# Altium PCB MainBoard.PcbDoc
Units mm, origin at the board's own origin, x right, y up, seen from the top; angles counter-clockwise.
Board outline 150 x 100 mm, 2 copper layers (Top Layer, Bottom Layer); 65 components, 98 nets, 335 pads, 2 vias.
Unrouted connection lines stored in the file: 23.
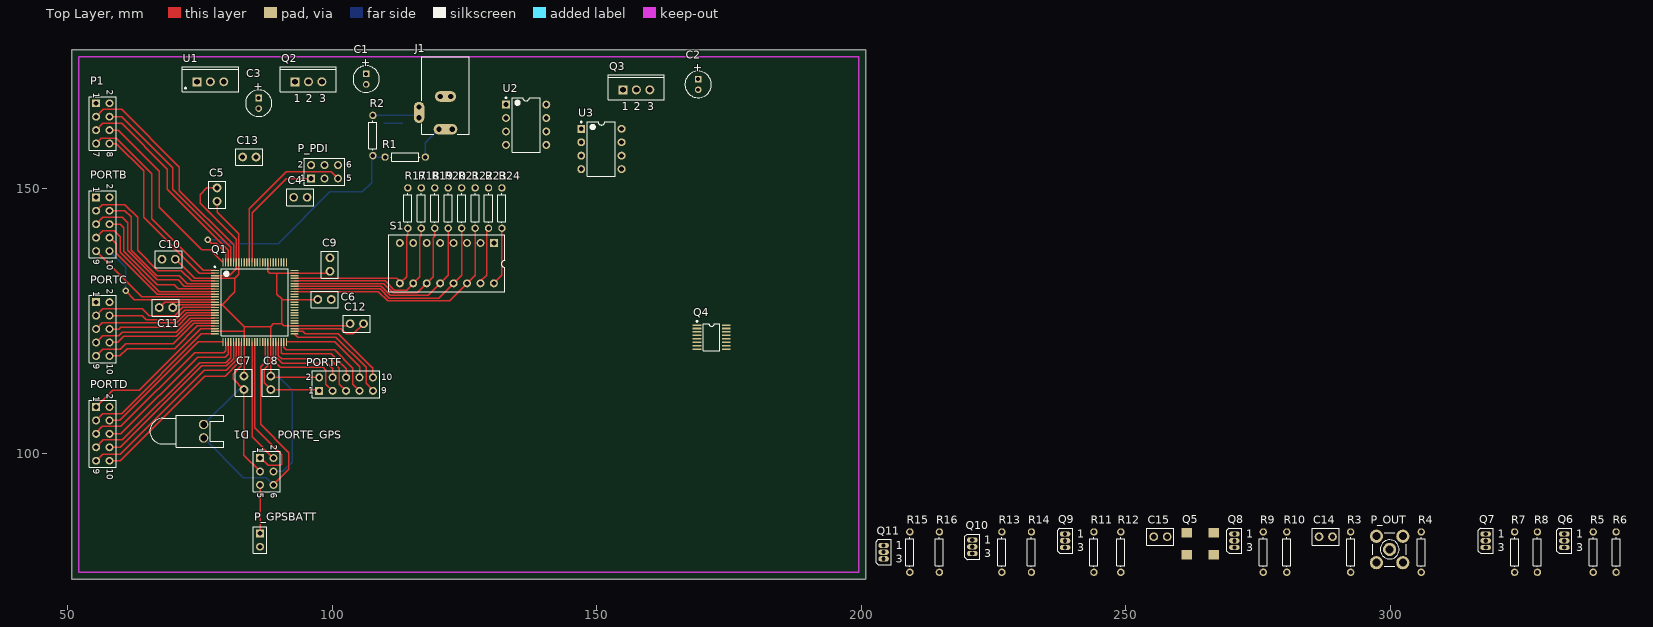
[diagram p0: Top Layer view]
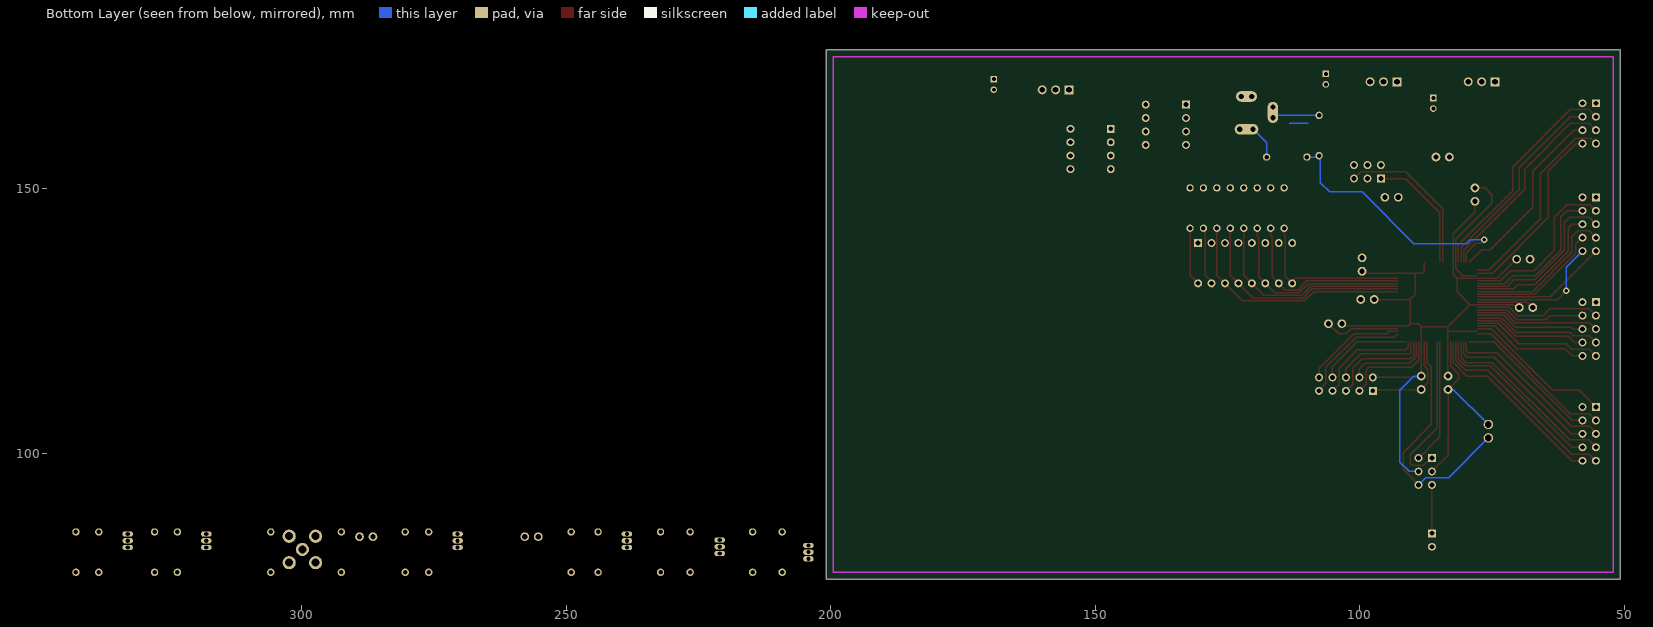
[diagram p1: Bottom Layer view, seen from below]

## Layer stack, top to bottom
Top Layer: signal copper 0.0356
Dielectric: dielectric 0.32, FR-4, Dk 4.8
Bottom Layer: signal copper 0.0356

## Board outline
50.8,76.2 200.8,76.2 200.8,176.2 50.8,176.2

## Design rules (kind name [scope] priority, off if disabled: settings)
Clearance [All] p1: gap=0.05
MinimumSolderMaskSliver [All] p1: minsoldermaskwidth=0.1
PolygonConnect [All] p1: connectstyle=Relief reliefconductorwidth=0.254 reliefentries=4 polygonreliefangle="90 Angle"
RoomDefinition MainBoard_AD9835 [InComponentClass('MainBoard_AD9835')] p1: confinementstyle=ConfineIn formatcopy=TRUE lockcomponents=FALSE outline 202.057,76.454 345.059,76.454 345.059,88.646 202.057,88.646
RoomDefinition MainBoard_XMega [InComponentClass('MainBoard_XMega')] p2: confinementstyle=ConfineIn formatcopy=TRUE lockcomponents=FALSE outline 50.419,27.813 119.507,27.813 119.507,176.657 50.419,176.657
RoomDefinition MainBoard_PSU [InComponentClass('MainBoard_PSU')] p3: confinementstyle=ConfineIn formatcopy=TRUE lockcomponents=FALSE outline 51.054,146.431 173.863,146.431 173.863,177.292 51.054,177.292
RoutingVias [All] p1: holewidth=0.8 width=1.6 viastyle="Through Hole" minholewidth=0.711 minwidth=1.27 maxholewidth=0.711 maxwidth=1.27
SMDNeckDown [All] p1: percent=100.000
SilkscreenOverComponentPads [All] p1: minsilkscreentomaskgap=0.254
SolderMaskExpansion [All] p1: expansion=0.102
TestPointUsage FabricationTestPointUsage [All] p1: valid=0 allowmultiple=FALSE
Testpoint FabricationTestpoint [All] p1: side=3 testpointundercomponent=TRUE minsize=1.016 maxsize=2.54 preferedsize=1.524 minholesize=0 maxholesize=1.016 preferedholesize=0.813 testpointgrid=0.025 style=297 order=0123456789
Width [All] p1: maxlimit=0.3 minlimit=0.1 preferedwidth=0.3
22 further rules are at their usual default settings.

## Classes and differential pairs
component class MainBoard_AD9835: C14 C15 P_OUT Q4 Q5 Q6 Q7 Q8 Q9 Q10 Q11 R3 R4 R5 R6 R7 R8 R9 R10 R11 R12 R13 R14 R15 R16
component class MainBoard_PSU: C1 C2 C3 J1 Q2 Q3 R1 R2 U1 U2 U3
component class MainBoard_XMega: C4 C5 C6 C7 C8 C9 C10 C11 C12 C13 D1 P1 P_GPSBATT P_PDI PORTB PORTC PORTD PORTE_GPS PORTF Q1 R17 R18 R19 R20 R21 R22 R23 R24 S1

## Components (designator, comment, footprint, x,y, rotation, side; value= is the part's Value field where it differs from the comment)
C1 "Cap Pol1" CAPPR2-5x6.8 106.426,170.688 r270 top
C2 "Cap Pol1" CAPPR2-5x6.8 169.164,169.672 r270 top
C3 "Cap Pol1" CAPPR2-5x6.8 86.106,166.116 r270 top
C4 "Cap" CAPR2.54-5.1x3.2 93.98,148.336 r0 top
C5 "Cap" CAPR2.54-5.1x3.2 78.232,148.844 r270 top
C6 "Cap" CAPR2.54-5.1x3.2 98.552,129.032 r180 top
C7 "Cap" CAPR2.54-5.1x3.2 83.312,113.284 r90 top
C8 "Cap" CAPR2.54-5.1x3.2 88.392,113.284 r90 top
C9 "Cap" CAPR2.54-5.1x3.2 99.568,135.636 r270 top
C10 "Cap" CAPR2.54-5.1x3.2 69.088,136.652 r0 top
C11 "Cap" CAPR2.54-5.1x3.2 68.58,127.508 r0 top
C12 "Cap" CAPR2.54-5.1x3.2 104.648,124.46 r180 top
C13 "Cap" CAPR2.54-5.1x3.2 84.328,155.956 r0 top
C14 "Cap" CAPR2.54-5.1x3.2 287.782,84.201 r0 top
C15 "Cap" CAPR2.54-5.1x3.2 256.54,84.201 r0 top
D1 "LED0" LED-0 75.692,104.14 r270 top
J1 "PWR2.5" KLD-0202 121.412,174.9 r270 top
P1 "Header 4X2" HDR2X4 55.372,166.116 r270 top
P_GPSBATT "Header 2" HDR1X2 86.36,84.836 r270 top
P_OUT "SMB" SMB_V-RJ45 299.847,81.788 r0 top
P_PDI "Header 3X2" HDR2X3 96.012,151.892 r0 top
PORTB "Header 5X2" HDR2X5 55.372,148.336 r270 top
PORTC "Header 5X2" HDR2X5 55.372,128.524 r270 top
PORTD "Header 5X2" HDR2X5 55.372,108.712 r270 top
PORTE_GPS "Header 3X2" HDR2X3 86.36,99.06 r270 top
PORTF "Header 5X2" HDR2X5 97.536,111.76 r0 top
Q1 "AT-XMega128A1_TQFP100" TQFP100_L 85.344,128.524 r0 top
Q2 "DE-SW050" TO-220 95.504,170.18 r0 top
Q3 "AnyVolt-Micro" TO-220 157.48,168.656 r0 top
Q4 "AD9835" TSSOP16 171.704,121.92 r270 top
Q5 "CSX750FCC50.000M-UT" CSX750 261.493,84.963 r0 top
Q6 "MOSFET-N" BCY-W3/B.8 332.867,83.439 r0 top
Q7 "MOSFET-N" BCY-W3/B.8 318.008,83.439 r0 top
Q8 "MOSFET-N" BCY-W3/B.8 270.51,83.439 r0 top
Q9 "MOSFET-N" BCY-W3/B.8 238.506,83.439 r0 top
Q10 "MOSFET-N" BCY-W3/B.8 220.98,82.296 r0 top
Q11 "MOSFET-N" BCY-W3/B.8 204.216,81.28 r0 top
R1 "Res1" AXIAL-0.3 113.792,155.956 r180 top
R2 "Res1" AXIAL-0.3 107.696,160.02 r270 top
R3 "Res1" AXIAL-0.3 292.481,81.28 r90 top
R4 "Res1" AXIAL-0.3 305.816,81.28 r90 top
R5 "Res1" AXIAL-0.3 338.328,81.28 r90 top
R6 "Res1" AXIAL-0.3 342.646,81.28 r90 top
R7 "Res1" AXIAL-0.3 323.469,81.28 r90 top
R8 "Res1" AXIAL-0.3 327.787,81.28 r90 top
R9 "Res1" AXIAL-0.3 275.971,81.28 r90 top
R10 "Res1" AXIAL-0.3 280.416,81.28 r90 top
R11 "Res1" AXIAL-0.3 243.967,81.28 r90 top
R12 "Res1" AXIAL-0.3 249.047,81.28 r90 top
R13 "Res1" AXIAL-0.3 226.568,81.28 r90 top
R14 "Res1" AXIAL-0.3 232.156,81.28 r90 top
R15 "Res1" AXIAL-0.3 209.169,81.28 r90 top
R16 "Res1" AXIAL-0.3 214.757,81.28 r90 top
R17 "Res1" AXIAL-0.3 114.3,146.304 r270 top
R18 "Res1" AXIAL-0.3 116.84,146.304 r270 top
R19 "Res1" AXIAL-0.3 119.38,146.304 r270 top
R20 "Res1" AXIAL-0.3 121.92,146.304 r270 top
R21 "Res1" AXIAL-0.3 124.46,146.304 r270 top
R22 "Res1" AXIAL-0.3 127,146.304 r270 top
R23 "Res1" AXIAL-0.3 129.54,146.304 r270 top
R24 "Res1" AXIAL-0.3 132.08,146.304 r270 top
S1 "SW-DIP8" DIP-16-KEY 130.556,139.7 r180 top
U1 "MCP1825S-3302E/AB" TO-220-AB3 76.962,170.18 r0 top
U2 "TC4427AEPA" PDIP300-PA8 136.652,162.052 r0 top
U3 "TC4427AEPA" PDIP300-PA8 150.876,157.48 r0 top

## Footprints (in the part's own frame and the unit in brackets; to place one, negate y for a bottom-side part, rotate by r counter-clockwise, add the part's x,y. Pads: shape width x height; smd on the part's side, far side on the other; paste and mask are expansions set on the pad)
AXIAL-0.3 [mm] "Axial Device, Thru-Hole; 2 Leads; 0.3 in Pin Spacing"
  round 1.4 hole 0.85: 1(-3.81,0) 2(3.81,0)
  silkscreen extent -2.77,-0.76 2.77,0.76
BCY-W3/B.8 [mm] "TO, Flat Index; 3 In-Line, Axial Leads; Body Dia. 4.6mm; Lead Dia. 0.5 mm (max)"
  oval 2x1 hole 0.8: 1(0,1.27) 2(0,0) 3(0,-1.27)
  silkscreen extent -1.41,-2.41 1.41,2.41
CAPPR2-5x6.8 [mm] "Capacitor, Electrolytic, Radial; Body 5 x 6.8 mm (Dia.xH typ); Pin Spacing 2 mm (typ)"
  rect 1.25x1.25 hole 0.75: 1(-1,0)
  round 1.25 hole 0.75: 2(1,0)
  silkscreen extent -2.5,-2.5 2.5,2.5
CAPR2.54-5.1x3.2 [mm] "Capacitor, Ceramic, Thru-Hole, Dipped Radial; Body 5.1 x 3.2 mm (WxT) Pin Spacing 2.54 mm (typ)"
  round 1.65 hole 1: 1(-1.27,0) 2(1.27,0)
  silkscreen extent -2.55,-1.6 2.55,1.6
CSX750 [mm]
  rect 2x1.8 smd: 1(0,-4.2) 2(5.08,-4.2) 3(5.08,0) 4(0,0)
DIP-16-KEY [mm] "DIP; 16 Leads; Row Spacing 7.62 mm; Pitch 2.54 mm"
  rect 1.5x1.5 hole 0.9: 1(0,0)
  round 1.5 hole 0.9: 2(2.54,0) 3(5.08,0) 4(7.62,0) 5(10.16,0) 6(12.7,0) 7(15.24,0) 8(17.78,0) 9(17.78,7.62) 10(15.24,7.62) 11(12.7,7.62) 12(10.16,7.62) 13(7.62,7.62) 14(5.08,7.62) 15(2.54,7.62) 16(0,7.62)
  silkscreen extent -2.05,-1.59 19.83,9.2
HDR1X2 [mm] "Connector; Header; 2 Position"
  rect 1.5x1.5 hole 0.9: 1(0,0)
  round 1.5 hole 0.9: 2(2.54,0)
  silkscreen extent -1.27,-1.27 3.81,1.27
HDR2X3 [mm] "Connector; Header; 3x2 Position"
  rect 1.5x1.5 hole 0.9: 1(0,0)
  round 1.5 hole 0.9: 2(0,2.54) 3(2.54,0) 4(2.54,2.54) 5(5.08,0) 6(5.08,2.54)
  silkscreen extent -1.27,-1.27 6.35,3.81
HDR2X4 [mm] "Connector; Header; 4x2 Position"
  rect 1.5x1.5 hole 0.9: 1(0,0)
  round 1.5 hole 0.9: 2(0,2.54) 3(2.54,0) 4(2.54,2.54) 5(5.08,0) 6(5.08,2.54) 7(7.62,0) 8(7.62,2.54)
  silkscreen extent -1.27,-1.27 8.89,3.81
HDR2X5 [mm] "Connector; Header; 5x2 Position"
  rect 1.5x1.5 hole 0.9: 1(0,0)
  round 1.5 hole 0.9: 2(0,2.54) 3(2.54,0) 4(2.54,2.54) 5(5.08,0) 6(5.08,2.54) 7(7.62,0) 8(7.62,2.54) 9(10.16,0) 10(10.16,2.54)
  silkscreen extent -1.27,-1.27 11.43,3.81
KLD-0202 [mm] "DC Power Jack, 2.5mm, KLD Series, PCB Mount"
  oval 2x4.5 all layers, no hole: 1(13.7,0)
  round 1.5 hole 1: 1A(13.7,-1.25) 1B(13.7,1.25) 2A(7.5,-1) 2B(7.5,1) 3A(9.5,-5) 3B(11.5,-5)
  oval 2x4 all layers, no hole: 2(7.5,0)
  oval 4x2 all layers, no hole: 3(10.5,-5)
  silkscreen extent 0,-4.5 14.6,4.5
LED-0 [mil] "Typical INFRARED GaAs LED; 2 Leads"
  round 70 hole 50: 1(50,0) 2(-50,0)
  silkscreen extent -120,-400 120,150
PDIP300-PA8 [mm] "DIP, 8-Leads, Row Spacing 7.62mm, Pitch 2.54mm, Body 9.5x6.6mm"
  rect 1.5x1.5 hole 0.9: 1(-3.81,3.81)
  round 1.5 hole 0.9: 2(-3.81,1.27) 3(-3.81,-1.27) 4(-3.81,-3.81) 5(3.81,-3.81) 6(3.81,-1.27) 7(3.81,1.27) 8(3.81,3.81)
  silkscreen extent -3.93,-5.15 2.65,5.23, body extent -3.6,-5.15 3.6,5.15, height 5.34
SMB_V-RJ45 [mm] "Connector; SMB Straight"
  round 2.5 hole 1.5: 1(0,0) 2(-2.5,-2.5) 2(-2.5,2.5) 2(2.5,-2.5) 2(2.5,2.5)
  silkscreen extent -3.15,-3.15 3.15,3.15
TO-220 [mm] "TO, Thru-Hole, Vertical, Heatsink Mounted; 3 In-Line Leads; Pitch 2.54 mm"
  rect 1.7x1.7 hole 1.1: 1(-2.54,0)
  round 1.7 hole 1.1: 2(0,0) 3(2.54,0)
  silkscreen extent -5.3,-1.85 5.3,2.85
TO-220-AB3 [mm] "TO, Thru-Hole, Vertical, Heatsink Mounted; 3 In-Line Leads; Pitch 2.54 mm"
  rect 1.7x1.7 hole 1.1: 1(-2.54,0)
  round 1.7 hole 1.1: 2(0,0) 3(2.54,0)
  silkscreen extent -5.35,-1.85 5.35,2.85, body extent -5.4,-1.9 5.4,2.9, height 22.9
TQFP100_L [mm] "100-Pin Plastic Thin Quad Flat Pack (TQFP100), IPC High Density"
  oval 1.55x0.25 smd: 1(-7.525,6) 2(-7.525,5.5) 3(-7.525,5) 4(-7.525,4.5) 5(-7.525,4) 6(-7.525,3.5) 7(-7.525,3) 8(-7.525,2.5) 9(-7.525,2) 10(-7.525,1.5) 11(-7.525,1) 12(-7.525,0.5) 13(-7.525,0) 14(-7.525,-0.5) 15(-7.525,-1) 16(-7.525,-1.5) 17(-7.525,-2) 18(-7.525,-2.5) 19(-7.525,-3) 20(-7.525,-3.5) 21(-7.525,-4) 22(-7.525,-4.5) 23(-7.525,-5) 24(-7.525,-5.5) 25(-7.525,-6) 51(7.525,-6) 52(7.525,-5.5) 53(7.525,-5) 54(7.525,-4.5) 55(7.525,-4) 56(7.525,-3.5) 57(7.525,-3) 58(7.525,-2.5) 59(7.525,-2) 60(7.525,-1.5) 61(7.525,-1) 62(7.525,-0.5) 63(7.525,0) 64(7.525,0.5) 65(7.525,1) 66(7.525,1.5) 67(7.525,2) 68(7.525,2.5) 69(7.525,3) 70(7.525,3.5) 71(7.525,4) 72(7.525,4.5) 73(7.525,5) 74(7.525,5.5) 75(7.525,6)
  oval 0.25x1.55 smd: 26(-6,-7.525) 27(-5.5,-7.525) 28(-5,-7.525) 29(-4.5,-7.525) 30(-4,-7.525) 31(-3.5,-7.525) 32(-3,-7.525) 33(-2.5,-7.525) 34(-2,-7.525) 35(-1.5,-7.525) 36(-1,-7.525) 37(-0.5,-7.525) 38(0,-7.525) 39(0.5,-7.525) 40(1,-7.525) 41(1.5,-7.525) 42(2,-7.525) 43(2.5,-7.525) 44(3,-7.525) 45(3.5,-7.525) 46(4,-7.525) 47(4.5,-7.525) 48(5,-7.525) 49(5.5,-7.525) 50(6,-7.525) 76(6,7.525) 77(5.5,7.525) 78(5,7.525) 79(4.5,7.525) 80(4,7.525) 81(3.5,7.525) 82(3,7.525) 83(2.5,7.525) 84(2,7.525) 85(1.5,7.525) 86(1,7.525) 87(0.5,7.525) 88(0,7.525) 89(-0.5,7.525) 90(-1,7.525) 91(-1.5,7.525) 92(-2,7.525) 93(-2.5,7.525) 94(-3,7.525) 95(-3.5,7.525) 96(-4,7.525) 97(-4.5,7.525) 98(-5,7.525) 99(-5.5,7.525) 100(-6,7.525)
  silkscreen extent -7.65,-6.35 6.35,6.8, body extent -7,-7 7,7, height 1.2
TSSOP16 [mm] "Shrink Small Outline; 16 Leads; Body Width 4.4 mm; Pitch 0.65 mm"
  rect 0.3x1.65 smd: 1(-2.275,-2.775) 2(-1.625,-2.775) 3(-0.975,-2.775) 4(-0.325,-2.775) 5(0.325,-2.775) 6(0.975,-2.775) 7(1.625,-2.775) 8(2.275,-2.775) 9(2.275,2.775) 10(1.625,2.775) 11(0.975,2.775) 12(0.325,2.775) 13(-0.325,2.775) 14(-0.975,2.775) 15(-1.625,2.775) 16(-2.275,2.775)
  silkscreen extent -3.1,-2.9 2.55,1.55

## Part data
C1 C2 C3: "Polarized Capacitor (Radial)"
C4 C5 C6 C7 C8 C9 C10 C11 C12 C13 C14 C15: "Capacitor"
D1: "Typical INFRARED GaAs LED"
J1: "Low Voltage Power Supply Connector"
P1: "Header, 4-Pin, Dual row"
P_GPSBATT: "Header, 2-Pin"
P_OUT: "SMB Straight Connector"
P_PDI PORTE_GPS: "Header, 3-Pin, Dual row"
PORTB PORTC PORTD PORTF: "Header, 5-Pin, Dual row"
Q6 Q7 Q8 Q9 Q10 Q11: "N-Channel MOSFET"
R1 R2 R3 R4 R5 R6 R7 R8 R9 R10 R11 R12 R13 R14 R15 R16 R17 R18 R19 R20 R21 R22 R23 R24: "Resistor"
S1: "4009 Series DIP Switch, Raised actuator"
U1: "500 mA, Low Voltage, Low Quiescent Current LDO Regulator, 3-Pin TO-220, Extended Temperature"
U2 U3: "1.5A Dual High-Speed Power MOSFET Driver, Non-Inverting, Industrial Temperature"

## Via types
v1: diameter 1.27, hole 0.711, Top Layer to Bottom Layer, 2 vias

## Nets (pads, with @x,y where several pads share a name; then routed paths per layer and width w, separated by ;. In a path a pad name is that pad's centre, name@x,y a point inside that pad or via, vN(x,y) a via of type N, cw(c..) or ccw(c..) an arc to the next point about the centre after c; other vN are vias at no path point)
AMP_ENABLE: Q1.62 U3.2
AVCC: C4.2 C5.2 C6.2 C7.2 C8.2 C9.2 C10.2 C11.2 C12.2 P1.2 P_PDI.2 PORTB.2 PORTC.2 PORTD.2 PORTE_GPS.4 PORTF.2 Q1.4 Q1.14 Q1.24 Q1.34 Q1.44 Q1.54 Q1.64 Q1.74 Q1.83 Q1.94 Q6.2 Q7.2 Q8.2 Q9.2 Q10.2 Q11.2 R5.2 R7.2 R9.2 R11.2 R13.2 R15.2 S1.1 S1.2 S1.3 S1.4 S1.5 S1.6 S1.7 S1.8 U1.3 | length 157.2
  Top Layer w0.254: C11.2@70.358,127.508 70.874,128.024 Q1.14 79.177,128.024 ; C10.2@70.866,136.144 73.986,133.024 Q1.4 81.606,133.024 ; Q1.24 83.305,123.024 83.344,123.063 ; C5.2 78.232,145.542 82.344,141.43 Q1.94 82.344,133.762 81.606,133.024 ; C7.2 83.344,114.586 Q1.34 83.344,123.063 ; Q1.83 87.844,134.406 88.226,134.024 89.535,134.024 ; C6.2@97.274,129.024 Q1.64 90.559,129.024 90.424,129.159 ; PORTF.2 88.646,114.3 C8.2 88.392,116.586 88.344,116.634 Q1.44 88.344,123.904 ; C9.2 99.226,134.024 Q1.74 89.535,134.024 ; C12.2 102.942,124.024 Q1.54 90.86,124.024 90.424,124.46 ; 79.177,128.024 83.344,123.857 ; 79.177,128.024 81.606,130.453 81.606,133.024 ; 83.344,123.063 83.344,123.857 ; 83.344,123.857 88.297,123.857 88.344,123.904 ; 88.344,123.904 88.9,124.46 90.424,124.46 ; 89.535,134.024 89.535,130.048 90.424,129.159 ; 90.424,124.46 90.424,129.159
  Bottom Layer w0.254: C8.2 89.789,114.554 92.456,111.887 92.456,98.298 90.678,96.52 PORTE_GPS.4
FSEL_3: Q1.58 Q8.3 R9.1
FSEL_5: Q4.10 Q8.1 R10.1
FSYNC_3: Q1.57 Q9.3 R11.1
FSYNC_5: Q4.9 Q9.1 R12.1
GND: C1.2 C2.2 C3.2 C4.1 C5.1 C6.1 C7.1 C8.1 C9.1 C10.1 C11.1 C12.1 C14.1 C15.1 D1.2 J1.2 J1.2A J1.2B J1.3 J1.3A J1.3B P1.1 P_GPSBATT.2 P_OUT.2 P_PDI.6 PORTB.1 PORTC.1 PORTD.1 PORTE_GPS.3 PORTF.1 Q1.3 Q1.13 Q1.23 Q1.33 Q1.43 Q1.53 Q1.63 Q1.73 Q1.84 Q1.93 Q1.95 Q2.2 Q3.2 Q4.5 Q4.13 Q5.2 R2.1 R3.1 R4.1 R17.1 R18.1 R19.1 R20.1 R21.1 R22.1 R23.1 R24.1 U1.2 U2.3 U3.3 | length 144.5
  Top Layer w0.254: PORTD.1 58.547,111.887 63.5,111.887 75.137,123.524 Q1.23 ; C11.1 68.326,128.524 Q1.13 ; Q1.3 80.565,133.524 81.844,134.803 Q1.95 81.844,140.406 75.057,147.193 75.057,148.844 76.327,150.114 C5.1 ; Q1.33 82.844,116.499 81.28,114.935 81.28,114.046 C7.1 83.312,99.568 PORTE_GPS.3 ; Q1.43 87.844,116.546 87.122,115.824 87.122,113.284 C8.1 97.282,112.014 PORTF.1 ; Q1.53 101.647,123.524 102.616,122.555 104.013,122.555 C12.1
  Bottom Layer w0.254: D1.2 82.296,112.014 C7.1 ; R2.1 115.842,163.83 J1.3
GPS_LED: D1.1 PORTE_GPS.6 Q1.42 | length 47.7
  Top Layer w0.254: Q1.42 87.344,117.189 86.487,116.332 86.487,105.41 91.821,100.076 91.821,96.901 PORTE_GPS.6
  Bottom Layer w0.254: D1.1 83.185,95.377 87.503,95.377 PORTE_GPS.6
GPS_RX: PORTE_GPS.1 Q1.38 | length 29.9
  Top Layer w0.254: Q1.38 85.344,104.775 90.424,99.695 90.424,97.917 90.17,97.663 87.884,97.663 86.487,99.06 PORTE_GPS.1
GPS_TX: PORTE_GPS.2 Q1.37 | length 23.6
  Top Layer w0.254: Q1.37 84.844,103.116 PORTE_GPS.2
NetC13_1: C13.1 Q4.16
NetC14_2: C14.2 Q4.2 Q4.3
NetP_GPSBATT_1: P_GPSBATT.1 PORTE_GPS.5 | length 9.1
  Top Layer w0.254: P_GPSBATT.1 PORTE_GPS.5
NetP_OUT_1: P_OUT.1 Q4.14 R3.2
NetQ4_1: Q4.1 R4.2
NetQ4_6: Q4.6 Q5.3
PDI: P_PDI.1 Q1.89 | length 23.2
  Top Layer w0.254: Q1.89 84.844,145.423 91.313,151.892 P_PDI.1
PDI_CLOCK: P_PDI.5 Q1.90 | length 30.3
  Top Layer w0.254: Q1.90 84.344,146.193 91.313,153.162 99.822,153.162 P_PDI.5
PORTA1: P1.3 Q1.96 | length 43.1
  Top Layer w0.254: P1.3 56.769,164.973 60.198,164.973 71.12,154.051 71.12,149.607 81.344,139.383 Q1.96
PORTA2: P1.4 Q1.97 | length 38.4
  Top Layer w0.254: P1.4 60.198,163.576 69.85,153.924 69.85,149.86 80.844,138.866 Q1.97
PORTA3: P1.5 Q1.98 | length 40
  Top Layer w0.254: P1.5 56.642,162.306 60.198,162.306 68.834,153.67 68.834,149.86 80.344,138.35 Q1.98
PORTA5: P1.6 Q1.100 | length 35.8
  Top Layer w0.254: P1.6 59.563,161.036 67.31,153.289 67.31,146.431 75.311,138.43 76.963,138.43 Q1.100
PORTA6: P1.7 Q1.1 | length 38.2
  Top Layer w0.254: P1.7 56.388,159.512 59.182,159.512 65.913,152.781 65.913,144.272 75.661,134.524 Q1.1
PORTA7: P1.8 Q1.2 | length 35.2
  Top Layer w0.254: P1.8 59.182,158.496 64.34,153.338 64.34,144.526 74.842,134.024 Q1.2
PORTB0: PORTB.3 Q1.5 | length 32.5
  Top Layer w0.254: PORTB.3 56.515,146.939 60.833,146.939 63.246,144.526 63.246,138.303 67.056,134.493 71.501,134.493 73.47,132.524 Q1.5
PORTB1: PORTB.4 Q1.6 | length 29.3
  Top Layer w0.254: PORTB.4 60.833,145.796 61.976,144.653 61.976,138.303 66.802,133.477 71.12,133.477 72.573,132.024 Q1.6
PORTB2: PORTB.5 Q1.7 | length 31.4
  Top Layer w0.254: PORTB.5 56.642,144.526 60.325,144.526 61.341,143.51 61.341,138.303 66.929,132.715 70.866,132.715 72.057,131.524 Q1.7
PORTB3: PORTB.6 Q1.8 | length 27.6
  Top Layer w0.254: PORTB.6 59.944,143.256 60.579,142.621 60.579,138.176 66.929,131.826 70.104,131.826 70.906,131.024 Q1.8
PORTB4: PORTB.7 Q1.9 | length 29.4
  Top Layer w0.254: PORTB.7 56.642,141.986 58.801,141.986 59.944,140.843 59.944,137.922 67.342,130.524 Q1.9
PORTB5: PORTB.8 Q1.10 | length 25.4
  Top Layer w0.254: PORTB.8 58.039,140.716 59.182,139.573 59.182,137.795 66.953,130.024 Q1.10
PORTB6: PORTB.9 Q1.11 | length 26
  Top Layer w0.254: PORTB.9 64.024,129.524 Q1.11
PORTB7: PORTB.10 Q1.12 | length 26.3
  Top Layer w0.254: v1(60.96,130.683) 62.619,129.024 Q1.12
  Bottom Layer w0.254: PORTB.10 60.96,135.128 v1(60.96,130.683)
PORTC0: PORTC.3 Q1.15 | length 24.1
  Top Layer w0.254: PORTC.3 56.642,127.254 64.135,127.254 65.405,125.984 70.231,125.984 71.771,127.524 Q1.15
PORTC1: PORTC.4 Q1.16 | length 21
  Top Layer w0.254: PORTC.4 64.135,125.984 64.897,125.222 70.358,125.222 72.16,127.024 Q1.16
PORTC2: PORTC.5 Q1.17 | length 23.7
  Top Layer w0.254: PORTC.5 56.515,124.587 70.612,124.587 72.549,126.524 Q1.17
PORTC3: PORTC.6 Q1.18 | length 21
  Top Layer w0.254: PORTC.6 59.69,123.444 60.071,123.825 70.612,123.825 72.811,126.024 Q1.18
PORTC4: PORTC.7 Q1.19 | length 24.4
  Top Layer w0.254: PORTC.7 56.642,122.174 59.69,122.174 60.325,122.809 70.485,122.809 73.2,125.524 Q1.19
PORTC5: PORTC.8 Q1.20 | length 21.6
  Top Layer w0.254: PORTC.8 59.436,120.904 60.579,122.047 70.485,122.047 73.462,125.024 Q1.20
PORTC6: PORTC.9 Q1.21 | length 25
  Top Layer w0.254: PORTC.9 56.642,119.634 59.944,119.634 60.96,120.65 69.977,120.65 73.851,124.524 Q1.21
PORTC7: PORTC.10 Q1.22 | length 22.3
  Top Layer w0.254: PORTC.10 59.817,118.364 61.214,119.761 70.231,119.761 74.494,124.024 Q1.22
PORTD0: PORTD.3 Q1.25 | length 29.2
  Top Layer w0.254: PORTD.3 56.642,107.442 60.198,107.442 75.28,122.524 Q1.25
PORTD1: PORTD.4 Q1.26 | length 27.6
  Top Layer w0.254: PORTD.4 59.817,106.172 74.644,120.999 Q1.26
PORTD2: PORTD.5 Q1.27 | length 32.8
  Top Layer w0.254: PORTD.5 55.372,103.886 56.515,105.029 60.071,105.029 74.041,118.999 79.502,118.999 79.844,119.341 Q1.27
PORTD3: PORTD.6 Q1.28 | length 31
  Top Layer w0.254: PORTD.6 60.071,103.632 74.549,118.11 79.756,118.11 80.344,118.698 Q1.28
PORTD4: PORTD.7 Q1.29 | length 35.4
  Top Layer w0.254: PORTD.7 56.769,102.489 60.325,102.489 74.93,117.094 79.883,117.094 80.844,118.055 Q1.29
PORTD5: PORTD.8 Q1.30 | length 33.6
  Top Layer w0.254: PORTD.8 59.944,101.092 75.311,116.459 80.01,116.459 81.344,117.793 Q1.30
PORTD6: PORTD.9 Q1.31 | length 37.8
  Top Layer w0.254: PORTD.9 56.642,99.822 59.944,99.822 75.819,115.697 80.01,115.697 81.844,117.531 Q1.31
PORTD7: PORTD.10 Q1.32 | length 36
  Top Layer w0.254: PORTD.10 59.944,98.552 75.946,114.554 79.756,114.554 82.344,117.142 Q1.32
PORTE0: Q1.35
PORTE1: Q1.36
PORTE4: Q1.39
PORTE5: Q1.40
PORTE6: Q1.41
PORTF0: PORTF.3 Q1.45 | length 18.7
  Top Layer w0.254: Q1.45 88.844,117.531 90.17,116.205 98.298,116.205 98.806,115.697 98.806,113.03 PORTF.3
PORTF1: PORTF.4 Q1.46 | length 16.1
  Top Layer w0.254: Q1.46 89.344,118.174 90.551,116.967 99.06,116.967 100.076,115.951 PORTF.4
PORTF2: PORTF.5 Q1.47 | length 19.9
  Top Layer w0.254: Q1.47 89.844,118.436 90.424,117.856 99.568,117.856 101.346,116.078 101.346,113.03 PORTF.5
PORTF3: PORTF.6 Q1.48 | length 17.2
  Top Layer w0.254: Q1.48 90.344,118.919 90.518,118.745 99.822,118.745 102.616,115.951 PORTF.6
PORTF4: PORTF.7 Q1.49 | length 20.5
  Top Layer w0.254: Q1.49 90.844,119.976 91.313,119.507 100.457,119.507 103.886,116.078 103.886,113.03 PORTF.7
PORTF5: PORTF.8 Q1.50 | length 17.8
  Top Layer w0.254: Q1.50 100.489,120.999 105.156,116.332 PORTF.8
PORTF6: PORTF.9 Q1.51 | length 21.1
  Top Layer w0.254: Q1.51 93.473,121.92 100.711,121.92 106.426,116.205 106.426,113.157 107.696,111.887 PORTF.9
PORTF7: PORTF.10 Q1.52 | length 19.7
  Top Layer w0.254: Q1.52@92.943,122.95 Q1.52 94.4,123.024 94.869,122.555 101.092,122.555 107.442,116.205 107.696,116.205 PORTF.10
PORTH0: Q1.55 Q7.3 R7.1
PORTH1: Q1.56 Q6.3 R5.1
PORTH4: Q1.59 Q10.3 R13.1
PORTH5: Q1.60 Q11.3 R15.1
PORTH6: Q1.61 U2.2
PORTJ0: Q1.65 R24.2 S1.16 | length 11
  Top Layer w0.254: S1.16 132.08,133.604 R24.2
PORTJ1: Q1.66 R23.2 S1.15 | length 11
  Top Layer w0.254: S1.15 128.016,132.461 129.159,133.604 129.159,142.113 R23.2
PORTJ2: Q1.67 R22.2 S1.14 | length 45.7
  Top Layer w0.254: Q1.67 108.744,130.524 110.49,128.778 122.174,128.778 S1.14 127,133.604 R22.2
PORTJ3: Q1.68 R21.2 S1.13 | length 43
  Top Layer w0.254: Q1.68 109.053,131.024 110.791,129.286 120.142,129.286 S1.13 124.46,133.604 R21.2
PORTJ4: Q1.69 R20.2 S1.12 | length 40.2
  Top Layer w0.254: Q1.69 109.268,131.524 110.998,129.794 118.11,129.794 S1.12 121.92,133.604 R20.2
PORTJ5: Q1.70 R19.2 S1.11 | length 37.5
  Top Layer w0.254: Q1.70 109.784,132.024 111.506,130.302 116.078,130.302 S1.11 119.126,133.35 119.126,140.716 119.38,140.97 R19.2
PORTJ6: Q1.71 R18.2 S1.10 | length 34.7
  Top Layer w0.254: Q1.71 110.046,132.524 111.76,130.81 114.046,130.81 S1.10 116.586,133.35 116.586,140.843 116.84,141.097 R18.2
PORTJ7: Q1.72 R17.2 S1.9 | length 31.5
  Top Layer w0.254: Q1.72 112.213,133.024 S1.9@112.966,132.27 ; S1.9 S1.9@112.966,132.27 ; R17.2 114.3,141.224 114.046,140.97 114.046,133.35 S1.9@112.966,132.27
PORTK0: Q1.75
PORTK1: Q1.76
PORTK2: Q1.77
PORTK3: Q1.78
PORTK4: Q1.79
PORTK5: Q1.80
PORTK6: Q1.81
PORTK7: Q1.82
PORTQ0: Q1.85
PORTQ1: Q1.86
PORTQ2: Q1.87
PORTQ3: Q1.88
PORTR0: Q1.91
PORTR1: Q1.92
PSEL0_5: Q4.11 Q10.1 R14.1
PSEL1_5: Q4.12 Q11.1 R16.1
SCLK_5: Q4.7 Q6.1 R6.1
SDATA_5: Q4.8 Q7.1 R8.1
V_5V: C2.1 Q2.3 R6.2 R8.2 R10.2 R12.2 R14.2 R16.2 U1.1 U2.6
V_12V: C3.1 Q3.3 U3.6
V_AMP: U3.7
V_BATT: C1.1 J1.1 J1.1A J1.1B Q2.1 Q3.1 R1.1 | length 7.6
  Bottom Layer w0.254: R1.1 117.602,158.64 J1.1A J1.1
V_DIV: Q1.99 R1.2 R2.2 | length 53.4
  Top Layer w0.254: v1(76.454,140.335) 77.155,139.634 78.044,139.634 79.844,137.834 Q1.99
  Bottom Layer w0.254: v1(76.454,140.335) 78.994,140.335 79.756,139.573 89.789,139.573 99.568,149.352 105.664,149.352 107.442,151.13 107.442,155.956 R2.2 107.95,155.956 R1.2 ; 109.728,162.306 113.284,162.306
V_SIG_GEN: C13.2 C15.2 Q4.4 Q4.15 Q5.1 Q5.4 U2.7
pads on no net: P_PDI.3 P_PDI.4 U2.1 U2.4 U2.5 U2.8 U3.1 U3.4 U3.5 U3.8

## Keep-outs
Keep-Out Layer:
  lines w0.3: 52.1,77.5 199.5,77.5 199.5,174.9 52.1,174.9 52.1,77.5

## Silkscreen, mask and mechanical layers (free items; w line width, h text height)
Drill Drawing:
  text ".LEGEND" at 130.188,118.872 h1.52
  text "Drill Drawing." at 130.188,116.332 h1.52

## Dimensions
52.1,77.5 to 199.5,77.5 on Mechanical 1
52.1,77.5 to 52.1,174.9 on Mechanical 1

## Text inside footprints (layer, text, board x,y; h text height)
C1: Top Overlay "+" at 105.676,174.663 h1.5 r270
C2: Top Overlay "+" at 168.414,173.647 h1.5 r270
C3: Top Overlay "+" at 85.356,170.091 h1.5 r270
J1: Mechanical 1 "Alert PCB fab to slot details" at 127.478,174.614 h0.3 r270; Mechanical 1 "Assign keep-out area to slot" at 127.978,174.614 h0.3 r270; Mechanical 1 "Mech 1 - Slot cut-out" at 126.978,174.614 h0.3 r270; Mechanical 1 "Mech 2 - Clearance, move to internal plane if present" at 126.478,174.614 h0.3 r270
P1: Top Overlay "8" at 57.404,156.972 h1.27 r270; Top Overlay "7" at 54.864,156.972 h1.27 r270; Top Overlay "1" at 54.864,168.148 h1.27 r270; Top Overlay "2" at 57.404,168.656 h1.27 r270
P_PDI: Top Overlay "6" at 102.616,153.924 h1.27; Top Overlay "5" at 102.616,151.384 h1.27; Top Overlay "2" at 93.472,153.924 h1.27; Top Overlay "1" at 93.98,151.384 h1.27
PORTB: Top Overlay "2" at 57.404,150.876 h1.27 r270; Top Overlay "1" at 54.864,150.368 h1.27 r270; Top Overlay "9" at 54.864,136.652 h1.27 r270; Top Overlay "10" at 57.404,136.652 h1.27 r270
PORTC: Top Overlay "2" at 57.404,131.064 h1.27 r270; Top Overlay "1" at 54.864,130.556 h1.27 r270; Top Overlay "9" at 54.864,116.84 h1.27 r270; Top Overlay "10" at 57.404,116.84 h1.27 r270
PORTD: Top Overlay "10" at 57.404,97.028 h1.27 r270; Top Overlay "9" at 54.864,97.028 h1.27 r270; Top Overlay "1" at 54.864,110.744 h1.27 r270; Top Overlay "2" at 57.404,111.252 h1.27 r270
PORTE_GPS: Top Overlay "6" at 88.392,92.456 h1.27 r270; Top Overlay "5" at 85.852,92.456 h1.27 r270; Top Overlay "2" at 88.392,101.6 h1.27 r270; Top Overlay "1" at 85.852,101.092 h1.27 r270
PORTF: Top Overlay "2" at 94.996,113.792 h1.27; Top Overlay "1" at 95.504,111.252 h1.27; Top Overlay "9" at 109.22,111.252 h1.27; Top Overlay "10" at 109.22,113.792 h1.27
Q2: Top Overlay "3" at 97.544,166.355 h1.5; Top Overlay "2" at 95.004,166.355 h1.5; Top Overlay "1" at 92.714,166.355 h1.5
Q3: Top Overlay "1" at 154.69,164.831 h1.5; Top Overlay "2" at 156.98,164.831 h1.5; Top Overlay "3" at 159.52,164.831 h1.5
Q6: Top Overlay "1" at 335.142,83.994 h1.5; Top Overlay "3" at 335.142,81.476 h1.5
Q7: Top Overlay "1" at 320.283,83.994 h1.5; Top Overlay "3" at 320.283,81.476 h1.5
Q8: Top Overlay "1" at 272.785,83.994 h1.5; Top Overlay "3" at 272.785,81.476 h1.5
Q9: Top Overlay "1" at 240.781,83.994 h1.5; Top Overlay "3" at 240.781,81.476 h1.5
Q10: Top Overlay "1" at 223.255,82.851 h1.5; Top Overlay "3" at 223.255,80.333 h1.5
Q11: Top Overlay "1" at 206.491,81.835 h1.5; Top Overlay "3" at 206.491,79.317 h1.5